# Altium PCB pcb.pcbdoc
Units mil, origin at the board's own origin, x right, y up, seen from the top; angles counter-clockwise.
Board outline 5825 x 3894.75 mil, 2 copper layers (Top Layer, Bottom Layer); 4 components, 34 nets, 60 pads, 11 vias.
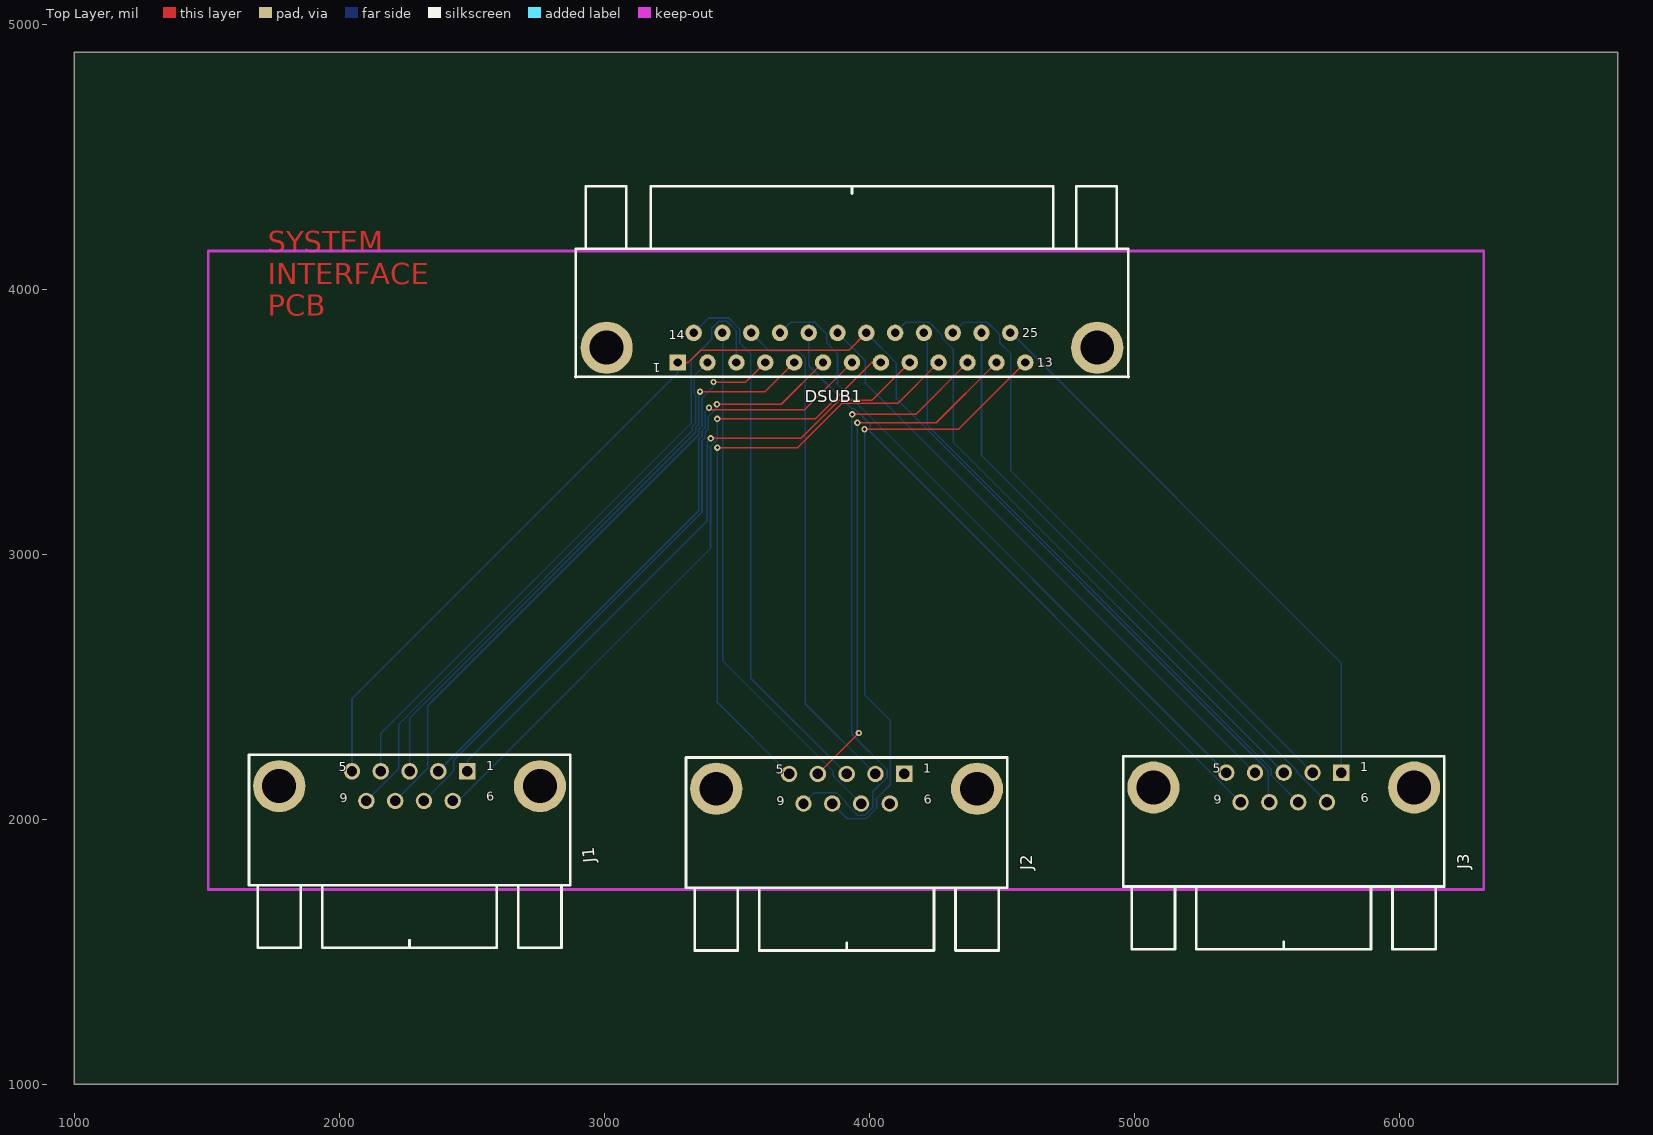
[diagram p0: Top Layer view]
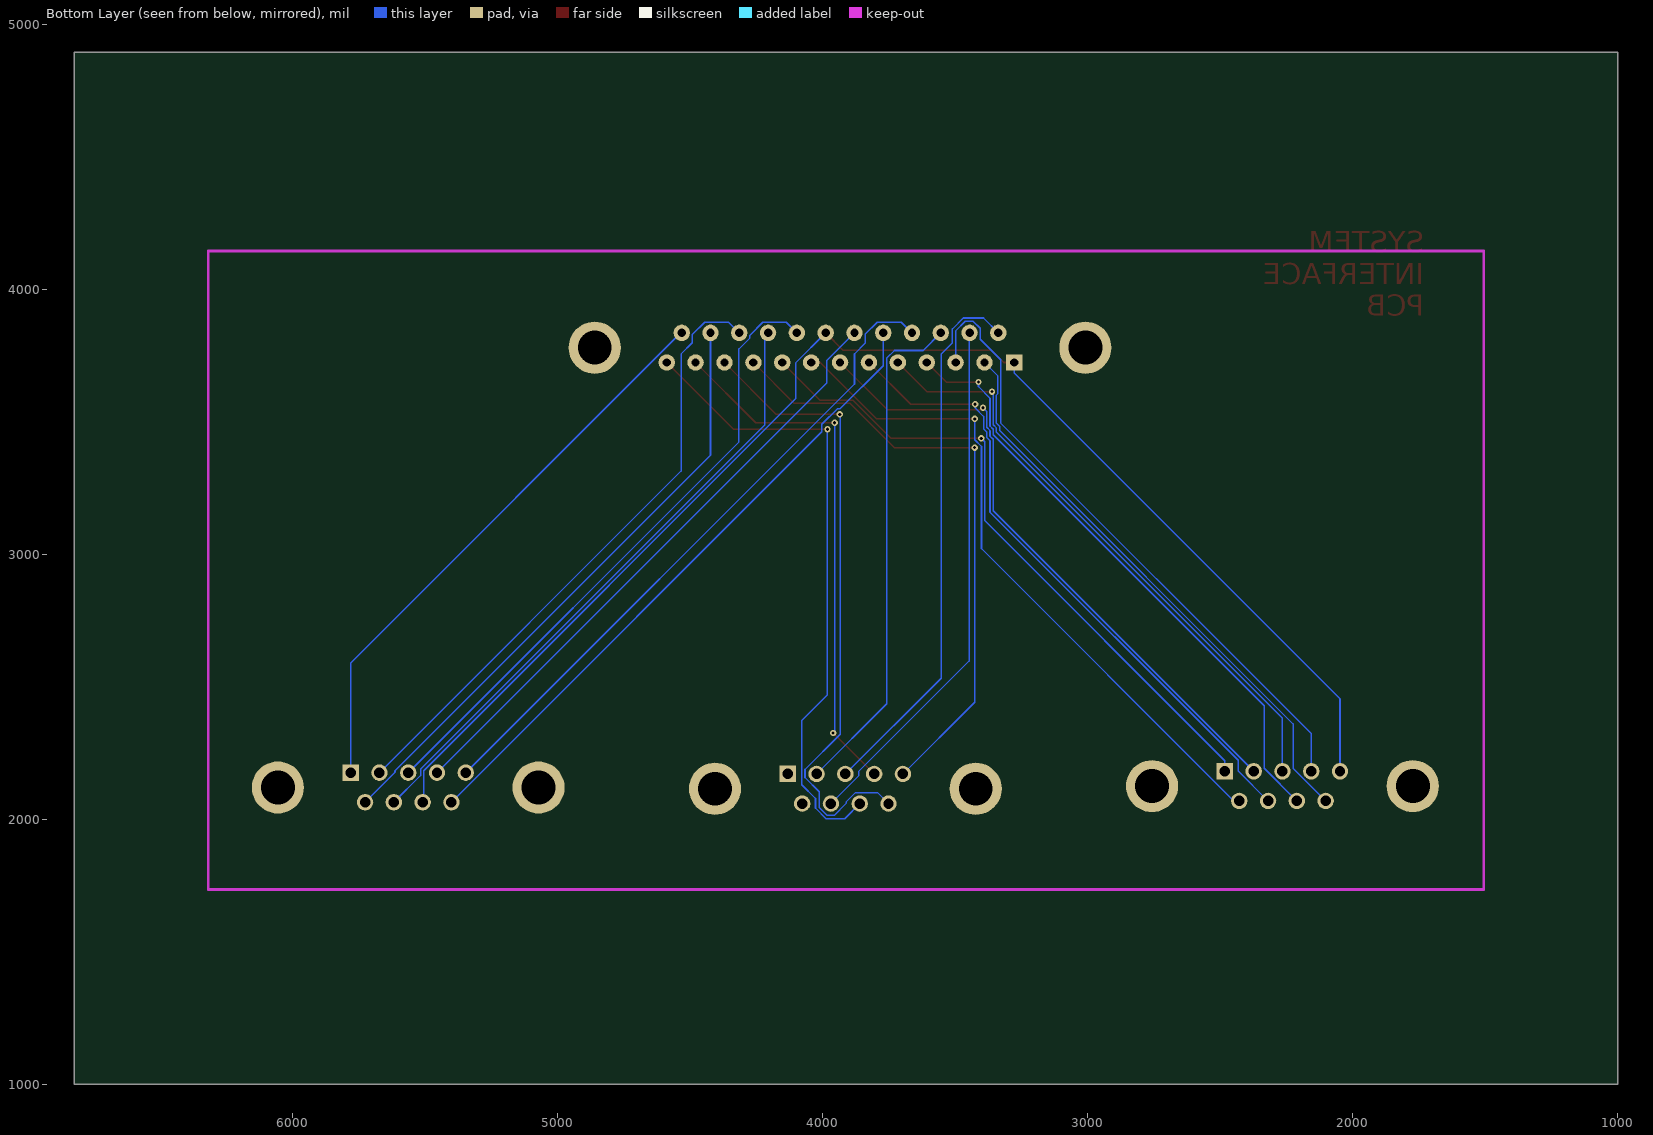
[diagram p1: Bottom Layer view, seen from below]

## Layer stack, top to bottom
Top Layer: signal copper (thickness not stored)
Dielectric: dielectric 12.6, FR-4, Dk 4.8
Bottom Layer: signal copper (thickness not stored)

## Board outline
6825,1000 1000,1000 1000,4894.75 6825,4894.75

## Components (designator, comment, footprint, x,y, rotation, side; value= is the part's Value field where it differs from the comment)
DSUB1 "DS1037-25FNAKT74-0CC" DS1037-25FNAKT74-0CC 3935,3780.24 r180 top
J1 "DS1037-09FNAKT74-0CC" DSUB9-1 2265,2125.24 r270 top
J2 "DS1037-09FNAKT74-0CC" DSUB9-1 3915,2115.24 r270 top
J3 "DS1037-09FNAKT74-0CC" DSUB9-1 5565,2120.24 r270 top

## Footprints (in the part's own frame and the unit in brackets; to place one, negate y for a bottom-side part, rotate by r counter-clockwise, add the part's x,y. Pads: shape width x height; smd on the part's side, far side on the other; paste and mask are expansions set on the pad)
DS1037-25FNAKT74-0CC [mil]
  rect 62x62 hole 31.5: 1(658.03,55.83)
  round 62 hole 31.5: 2(545.3,55.9) 3(436.2,55.9) 4(327.2,55.9) 5(218.1,55.9) 6(109.1,55.8) 7(0,55.8) 8(-109,55.8) 9(-218.1,55.8) 12(-545.4,55.9) 13(-654.3,55.9) 14(597.6,-55.9) 15(489,-55.9) 16(380.3,-55.9) 17(271.7,-55.9) 18(163,-55.9) 19(54.3,-55.9) 20(-54.3,-55.9) 21(-163,-55.9) 22(-271.6,-55.9) 23(-380.3,-55.9) 24(-489,-55.9) 25(-597.6,-55.9)
  round 61.81 hole 31.5: 10(-327.1,55.9) 11(-436.2,55.9)
  round 196.85 hole 127.95: 26(926,0) 27(-926,0)
  silkscreen extent -1044,-610 1044,111
DSUB9-1 [mil]
  rect 62x62 hole 39.37: 1(-55.91,217.32)
  round 62 hole 39.37: 2(-55.9,108.66) 3(-55.9,0) 4(-55.9,-108.66) 5(-55.9,-217.32) 6(55.91,162.99) 7(55.91,54.33) 8(55.91,-54.33) 9(55.91,-162.99)
  round 196.85 hole 127.95: 10(0,492.12) 11(0,-492.12)
  silkscreen extent -118,-606 610,606

## Via types
v1: diameter 24, hole 12, Top Layer to Bottom Layer, 11 vias

## Nets (pads, with @x,y where several pads share a name; then routed paths per layer and width w, separated by ;. In a path a pad name is that pad's centre, name@x,y a point inside that pad or via, vN(x,y) a via of type N, cw(c..) or ccw(c..) an arc to the next point about the centre after c; other vN are vias at no path point)
+3V3: DSUB1.21 J3.3 | length 2399.9
  Bottom Layer w6: DSUB1.21 4138.3,3876.44 4226.4,3876.44 4275.2,3827.64 4275.2,3816.84 4316.7,3775.44 4316.7,3424.44 J3.3
+5V: DSUB1.22 J3.7 | length 2357
  Bottom Layer w6: DSUB1.22 4218.7,3824.04 4218.7,3488.34 5518.5,2188.54 5518.5,2165.14 J3.7
+PACK: DSUB1.24 J3.6 | length 2311.9
  Bottom Layer w6: DSUB1.24 4424,3374.64 5615,2183.54 5615,2177.24 J3.6
ANT_REL_A: DSUB1.18 J3.9 | length 2452.9
  Bottom Layer w6: DSUB1.18 3772,3712.54 3934.9,3549.54 3945,3549.54 4003.7,3490.84 4003.7,3462.64 J3.9
ANT_REL_B: DSUB1.19 J3.4 | length 2312.6
  Bottom Layer w6: DSUB1.19 3985.2,3731.64 3985.2,3647.24 J3.4
C_GATE_BUFF: DSUB1.16 J2.2 | length 1922.8
  Bottom Layer w6: DSUB1.16 3621.1,3769.74 3729.6,3769.74 3758.3,3740.94 3758.3,2436.44 J2.2
CANH: DSUB1.12 J2.4 | length 2011.5
  Top Layer w6: J2.4 v1(3961,2325.74) ; v1(3955.4,3497.14) 4253.2,3497.14 DSUB1.12
  Bottom Layer w6: v1(3955.4,3497.14) 3955.4,2331.34 v1(3961,2325.74)
CANL: DSUB1.13 J2.8 | length 2409.5
  Top Layer w6: v1(3982.6,3472.04) 4337,3472.04 DSUB1.13
  Bottom Layer w6: J2.8 3917.5,2002.44 3988,2002.44 4027.7,2042.24 4027.7,2078.74 4079.2,2130.14 4079.2,2373.04 3982.6,2469.64 v1(3982.6,3472.04)
D_GATE_BUFF: DSUB1.17 J3.5 | length 2491.9
  Bottom Layer w6: DSUB1.17 3703.6,3876.44 3795,3876.44 3840.6,3830.84 3840.6,3796.54 3880.5,3756.74 3880.5,3643.34 J3.5
DIS_TRANS_UARTN: DSUB1.23 J3.2 | length 2356.3
  Bottom Layer w6: DSUB1.23 4355.7,3876.44 4446.2,3876.44 4492.5,3830.14 4492.5,3798.84 4535,3756.34 4535,3314.84 J3.2
DSUB1_26: DSUB1.26
DSUB1_27: DSUB1.27
EPS_MOSI_A/TX: DSUB1.3 J1.4 | length 2428.9
  Bottom Layer w6: J1.4 2156.3,2323.54 3329,3496.24 3329,3599.84 3328.2,3600.64 3328.2,3734.64 3405.9,3812.24 3405.9,3853.44 3432.7,3880.24 3462,3880.24 3498.8,3843.34 DSUB1.3
EPS_SCK_A/RX: DSUB1.4 J1.8 | length 2304.9
  Top Layer w6: v1(3412.4,3650.54) 3534,3650.54 DSUB1.4
  Bottom Layer w6: J1.8 2333.6,2192.24 2333.6,2428.14 3356.8,3451.34 3356.8,3472.44 3368.9,3484.54 3368.9,3589.84 3412.4,3633.34 v1(3412.4,3650.54)
GND: DSUB1.1 DSUB1.20 J1.5 J3.8 | length 5213
  Top Layer w6: DSUB1.1 3317.1,3724.44 3363.5,3770.84 3924,3770.84 DSUB1.20
  Bottom Layer w6: J1.5 2047.7,2455.04 3277,3684.34 DSUB1.1 ; DSUB1.20 4102.9,3722.54 4102.9,3587.04 5506.4,2183.54 5506.4,2068.64 J3.8
I2C_SCL: DSUB1.15 J2.7 | length 1993.6
  Bottom Layer w6: DSUB1.15 3448,3834.14 3448,2597.54 3863.6,2181.94 3863.6,2165.04 J2.7
I2C_SDA: DSUB1.14 J2.3 | length 2061.1
  Bottom Layer w6: DSUB1.14 3393.6,3892.34 3469.6,3892.34 3510.9,3850.94 3510.9,3799.24 3553.3,3756.84 3553.3,2532.84 J2.3
J1_10: J1.10
J1_11: J1.11
J2_1: J2.1
J2_6: J2.6
J2_10: J2.10
J2_11: J2.11
J3_10: J3.10
J3_11: J3.11
MISO_A: DSUB1.2 J1.9 | length 2191.8
  Bottom Layer w6: J1.9 2224.9,2192.24 2224.9,2359.84 3332.5,3467.44 3332.5,3482.54 3344.6,3494.64 3344.6,3601.34 3340.4,3605.64 3340.4,3675.04 DSUB1.2
OBC_MOSI_A/TX: DSUB1.6 J1.7 | length 2421.6
  Top Layer w6: v1(3425.1,3566.64) 3668.2,3566.64 DSUB1.6
  Bottom Layer w6: J1.7 2432.3,2182.24 2432.3,2222.64 3368.9,3159.14 3368.9,3429.14 3381,3441.24 3381,3462.34 3393.1,3474.54 3393.1,3520.34 3425.1,3552.24 v1(3425.1,3566.64)
OBC_SCK_A/RX: DSUB1.7 J1.2 | length 2413
  Top Layer w6: v1(3395.3,3553.74) 3403.4,3545.54 3756.2,3545.54 DSUB1.7
  Bottom Layer w6: J1.2 3356.8,3164.24 3356.8,3434.14 3368.9,3446.34 3368.9,3467.44 3381,3479.54 3381,3539.44 v1(3395.3,3553.74)
PAY_MOSI_A/TX: DSUB1.9 J1.1 | length 2507.5
  Top Layer w6: v1(3402.1,3437.94) 3742.2,3437.94 3886.2,3582.04 4010.7,3582.04 DSUB1.9
  Bottom Layer w6: J1.1 2482.3,2221.24 3389,3127.84 3389,3424.84 v1(3402.1,3437.94)
PAY_SCK_A/RX: DSUB1.10 J2.5 | length 2312.4
  Top Layer w6: v1(3426.9,3403.04) 3729.4,3403.04 3896.3,3569.94 4107.7,3569.94 DSUB1.10
  Bottom Layer w6: v1(3426.9,3403.04) 3426.9,2441.94 J2.5
RST_EPS: DSUB1.5 J1.3 | length 2288.3
  Top Layer w6: v1(3361.5,3614.34) 3606.9,3614.34 DSUB1.5
  Bottom Layer w6: J1.3 2265,2381.04 3344.6,3460.64 3344.6,3477.44 3356.8,3489.64 3356.8,3609.64 v1(3361.5,3614.34)
RST_OBC: DSUB1.8 J1.6 | length 2573.4
  Top Layer w6: v1(3426.5,3511.44) 3796.7,3511.44 4009.7,3724.44 DSUB1.8
  Bottom Layer w6: J1.6 2448.4,2069.34 3401.1,3022.04 3401.1,3407.14 3426.5,3432.54 v1(3426.5,3511.44)
RST_PAY: DSUB1.11 J2.9 | length 2407.8
  Top Layer w6: v1(3936.2,3528.44) 4175.3,3528.44 DSUB1.11
  Bottom Layer w6: J2.9 3793.6,2100.94 3876.5,2100.94 3912.1,2065.44 3912.1,2059.84 3957.3,2014.64 3983,2014.64 4013.1,2044.74 4013.1,2103.84 4067.1,2157.74 4067.1,2188.24 3934.3,2321.04 3934.3,3526.54 v1(3936.2,3528.44)
RTC_VBATT: DSUB1.25 J3.1 | length 2179.6
  Bottom Layer w6: DSUB1.25 4535.9,3836.14 5782.3,2589.74 J3.1

## Other copper
Top Layer:
  text "SYSTEM / INTERFACE / PCB" at 1730,3900.24 h80

## Silkscreen, mask and mechanical layers (free items; w line width, h text height)
Document:
  lines w0.1: 3911.5,2946.37 3913.5,2948.37

## Text inside footprints (layer, text, board x,y; h text height)
DSUB1: Top Overlay "1" at 3212.6,3722.14 h35 r180; Top Overlay "13" at 4635.12,3705.86 h35 r3; Top Overlay "25" at 4577,3819.44 h35; Top Overlay "14" at 3243.1,3811.64 h35
J1: Top Overlay "1" at 2554.31,2185.64 h35; Top Overlay "5" at 1997.32,2181.64 h35; Top Overlay "9" at 2003.15,2061.73 h35 r6; Top Overlay "6" at 2557.15,2067.73 h35 r6
J2: Top Overlay "1" at 4204.32,2175.64 h35; Top Overlay "5" at 3647.32,2171.64 h35; Top Overlay "9" at 3653.15,2051.73 h35 r6; Top Overlay "6" at 4207.15,2057.73 h35 r6
J3: Top Overlay "1" at 5854.32,2180.64 h35; Top Overlay "5" at 5297.32,2176.64 h35; Top Overlay "9" at 5303.15,2056.73 h35 r6; Top Overlay "6" at 5857.15,2062.73 h35 r6